# Altium PCB VoltageInput.PcbDoc
Units mm, origin at the board's own origin, x right, y up, seen from the top; angles counter-clockwise.
Board outline 60 x 60 mm, 2 copper layers (Top Layer, Bottom Layer); 40 components, 25 nets, 128 pads, 32 vias.
Unrouted connection lines stored in the file: 80.
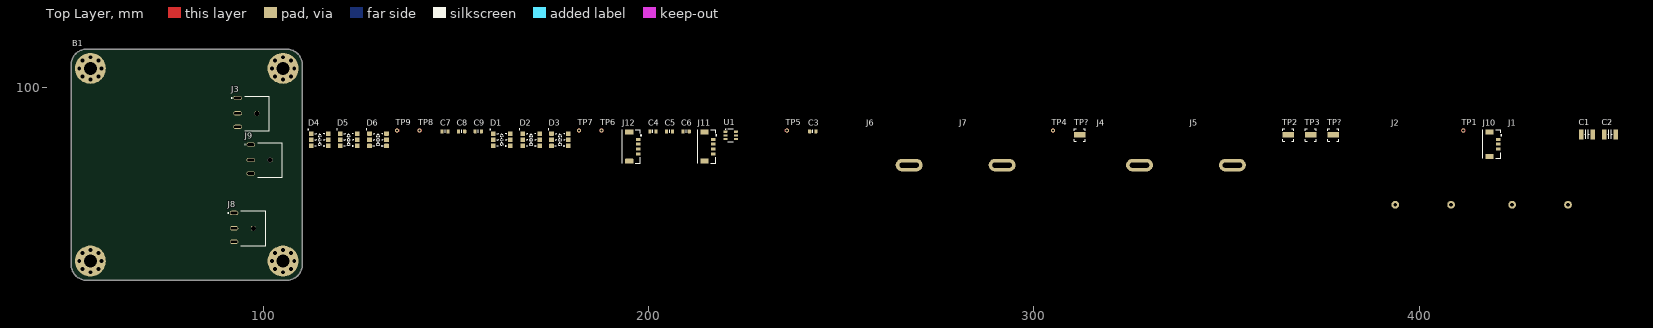
[diagram p0: Top Layer view]
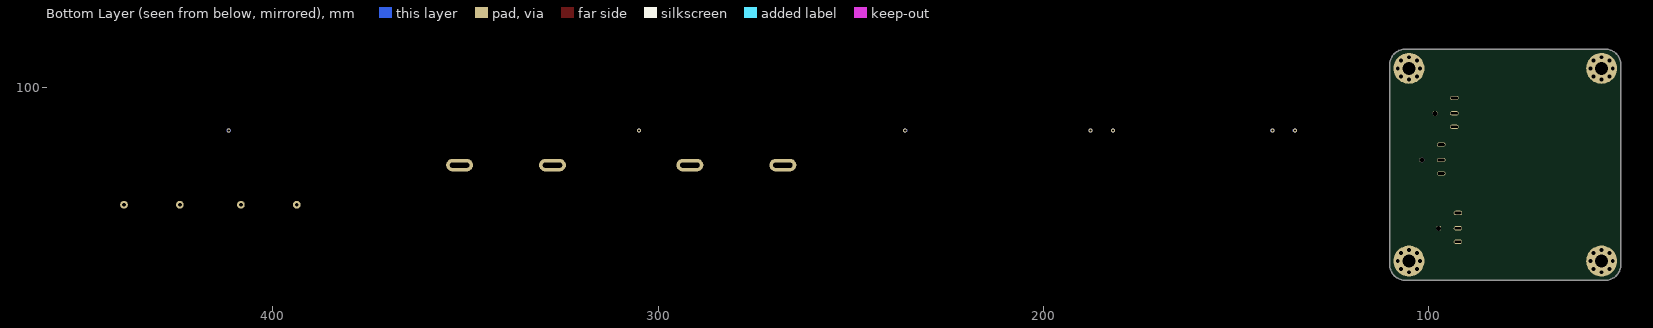
[diagram p1: Bottom Layer view, seen from below]

## Layer stack, top to bottom
Top Solder: solder mask 0.0102, Solder Resist, Dk 3.5
Top Layer: signal copper 0.0356
Dielectric 1: dielectric 0.32, FR-4, Dk 4.8
Bottom Layer: signal copper 0.0356
Bottom Solder: solder mask 0.0102, Solder Resist, Dk 3.5

## Board outline
54,50 cw(c54,54) 50,54 50,106 cw(c54,106) 54,110 106,110 cw(c106,106) 110,106 110,54 cw(c106,54) 106,50

## Design rules (kind name [scope] priority, off if disabled: settings)
Clearance [All] p1: gap=0.254 ignorepadtopadclearanceinfootprint=FALSE except(0: Arc-Hole Track-Hole SMDPad-Hole THPad-Hole Via-Hole Fill-Hole Poly-Hole Region-Hole Text-Hole)
PolygonConnect [All] p1: connectstyle=Relief reliefconductorwidth=0.254 reliefentries=4 polygonreliefangle="90 Angle" airgapwidth=0.254
RoutingVias [All] p1: holewidth=0.711 width=1.27 viastyle="Through Hole" minholewidth=0.711 minwidth=1.27 maxholewidth=0.711 maxwidth=1.27
SolderMaskExpansion [All] p1: expansion=0.102 istentingtop=FALSE
Width [All] p1: maxlimit=0.254 minlimit=0.254 preferedwidth=0.254
30 further rules are at their usual default settings.

## Components (designator, comment, footprint, x,y, rotation, side; value= is the part's Value field where it differs from the comment)
B1 "Board Outline Square" PCB_OUTLINE_SQUARE 80,80 r0 top locked
C1 "Capacitor - Ceramic - Generic" CAPACITOR_1210(3225)_GENERIC 443.611,87.884 r0 top value=10uF
C2 "Capacitor - Ceramic - Generic" CAPACITOR_1210(3225)_GENERIC 449.58,87.884 r0 top value=10uF
C3 "Capacitor - Ceramic - Generic" CAPACITOR_0603(1608)_GENERIC 242.57,88.646 r0 top value=100nF
C4 "Capacitor - Ceramic - Generic" CAPACITOR_0603(1608)_GENERIC 201.041,88.646 r0 top value=100nF
C5 "Capacitor - Ceramic - Generic" CAPACITOR_0603(1608)_GENERIC 205.359,88.646 r0 top value=100nF
C6 "Capacitor - Ceramic - Generic" CAPACITOR_0603(1608)_GENERIC 209.677,88.646 r0 top value=100nF
C7 "Capacitor - Ceramic - Generic" CAPACITOR_0603(1608)_GENERIC 147.066,88.646 r0 top value=100nF
C8 "Capacitor - Ceramic - Generic" CAPACITOR_0603(1608)_GENERIC 151.384,88.646 r0 top value=100nF
C9 "Capacitor - Ceramic - Generic" CAPACITOR_0603(1608)_GENERIC 155.702,88.646 r0 top value=100nF
D1 "APA102C" 5X5MM(6PIN)_JLEAD_GENERIC 161.798,86.487 r0 top
D2 "APA102C" 5X5MM(6PIN)_JLEAD_GENERIC 169.418,86.487 r0 top
D3 "APA102C" 5X5MM(6PIN)_JLEAD_GENERIC 176.911,86.487 r0 top
D4 "APA102C" 5X5MM(6PIN)_JLEAD_GENERIC 114.554,86.487 r0 top
D5 "APA102C" 5X5MM(6PIN)_JLEAD_GENERIC 122.047,86.487 r0 top
D6 "APA102C" 5X5MM(6PIN)_JLEAD_GENERIC 129.667,86.487 r0 top
J1 "PP45 Staple" CONNECTOR_ACCESSORY_PP45-STAPLE_ANDERSON 431.419,69.596 r0 top
J2 "PP45 Staple" CONNECTOR_ACCESSORY_PP45-STAPLE_ANDERSON 401.066,69.596 r0 top
J3 "839-1508-ND" CONNECTOR_BARREL_TENSILITY_839-1508-ND 98.218,93.345 r90 top
J4 "PP45" CONNECTOR_BTOC_PP45_ANDERSON 327.406,79.883 r0 top
J5 "PP45" CONNECTOR_BTOC_PP45_ANDERSON 351.536,79.883 r0 top
J6 "PP45" CONNECTOR_BTOC_PP45_ANDERSON 267.589,79.883 r0 top
J7 "PP45" CONNECTOR_BTOC_PP45_ANDERSON 291.719,79.883 r0 top
J8 "839-1508-ND" CONNECTOR_BARREL_TENSILITY_839-1508-ND 97.282,63.5 r90 top
J9 "839-1508-ND" CONNECTOR_BARREL_TENSILITY_839-1508-ND 101.647,81.224 r90 top
J10 "Connector - Header - 3P 2M - Generic" CONNECTOR_HEADER_MOLEX_5055670381 418.846,85.344 r90 top
J11 "Connector - Header - 4P 2M - Generic" CONNECTOR_HEADER_MOLEX_5055670481 215.011,84.709 r90 top
J12 "Connector - Header - 4P 2M - Generic" CONNECTOR_HEADER_MOLEX_5055670481 195.453,84.709 r90 top
TP1 "Test Point - THT" TESTPOINT_THT_OCTAGON 411.48,88.9 r90 top
TP2 "519XTR" TESTPOINT_LOOP_SMD_KEYSTONE_519X 366.014,87.757 r0 top
TP3 "519XTR" TESTPOINT_LOOP_SMD_KEYSTONE_519X 371.856,87.757 r0 top
TP4 "Test Point - THT" TESTPOINT_THT_OCTAGON 304.927,88.9 r90 top
TP5 "Test Point - THT" TESTPOINT_THT_OCTAGON 235.839,88.9 r90 top
TP6 "Test Point - THT" TESTPOINT_THT_OCTAGON 187.706,88.9 r90 top
TP7 "Test Point - THT" TESTPOINT_THT_OCTAGON 181.864,88.9 r90 top
TP8 "Test Point - THT" TESTPOINT_THT_OCTAGON 140.462,88.9 r90 top
TP9 "Test Point - THT" TESTPOINT_THT_OCTAGON 134.62,88.9 r90 top
TP? "519XTR" TESTPOINT_LOOP_SMD_KEYSTONE_519X 377.698,87.757 r0 top
TP? "519XTR" TESTPOINT_LOOP_SMD_KEYSTONE_519X 311.912,87.757 r0 top
U1 "LM74700" SOT23-6(DBV0006A)_TI 221.234,87.63 r0 top

## Footprints (in the part's own frame and the unit in brackets; to place one, negate y for a bottom-side part, rotate by r counter-clockwise, add the part's x,y. Pads: shape width x height; smd on the part's side, far side on the other; paste and mask are expansions set on the pad)
5X5MM(6PIN)_JLEAD_GENERIC [mm]
  rrect20% 1.2x1.2 smd: 1(-2.2,1.6) 2(-2.2,0) 3(-2.2,-1.6) 4(2.2,-1.6) 5(2.2,0) 6(2.2,1.6)
  silkscreen extent -3.1,-1.8 1.3,2.8, body extent -2.75,-2.5 2.75,2.5, height 1.55
CAPACITOR_0603(1608)_GENERIC [mm]
  rrect20% 0.8x0.95 smd: 1(-0.8,0) 2(0.8,0)
  silkscreen extent 0,-0.4 0,0.4, body extent -0.8,-0.4 0.8,0.4, height 0.9
CAPACITOR_1210(3225)_GENERIC [mm]
  rrect20% 1.15x2.6 smd: 1(-1.5,0) 2(1.5,0)
  silkscreen extent -0.6,-1.2 0.6,1.2, body extent -1.6,-1.25 1.6,1.25, height 2
CONNECTOR_ACCESSORY_PP45-STAPLE_ANDERSON [mm]
  round 2 hole 1: 1(-7.25,0) 1(7.25,0)
  oval 7x3.25 on Mech16: ""(-4,18.2) ""(3.9,18.2)
  body extent -7.75,-0.5 7.75,0.5, height 9.4
CONNECTOR_BARREL_TENSILITY_839-1508-ND [mm]
  oval 1.108x2.216 hole 0.6 slot 1.8 at 90 deg mask+0.05: 1(4,5) 2(-3.5,5) 3(0,5)
  round 1.3 hole 1.3 unplated paste-2539.97 mask+0: ""(0,0)
  silkscreen extent -4.5,-3.2 4.5,6.6, body extent -4.25,-3 4.25,6.5, height 5.5
CONNECTOR_BTOC_PP45_ANDERSON [mm]
  oval 7x3.25 hole 1.25 slot 5 at 0 deg: 1(0,0)
  oval 7x3.25 on Mech16: ""(-7.9,0) ""(0,7.92) ""(7.9,0)
  body extent -4.45,-28.1 3.96,0.52, height 8.39
CONNECTOR_HEADER_MOLEX_5055670381 [mm]
  rrect20% 0.8x1.2 smd: 1(1.25,-1.75) 2(0,-1.75) 3(-1.25,-1.75)
  rrect20% 1.3x2.15 smd mask+0.076: M1(3.15,0.545) M2(-3.15,0.545)
  silkscreen extent -3.7,-2.65 3.7,2.3
CONNECTOR_HEADER_MOLEX_5055670481 [mm]
  rrect20% 0.8x1.2 smd: 1(1.875,-1.75) 2(0.625,-1.75) 3(-0.625,-1.75) 4(-1.875,-1.75)
  rrect20% 1.3x2.15 smd mask+0.076: M1(3.775,0.545) M2(-3.775,0.545)
  silkscreen extent -4.33,-2.65 4.33,2.3
PCB_OUTLINE_SQUARE [mm]
  round 8 hole 3.4: 1(-25,-25) 1(-25,25) 1(25,-25) 1(25,25)
SOT23-6(DBV0006A)_TI [mm]
  rrect20% 0.972x0.558 smd: 1(-1.362,0.95) 2(-1.362,0) 3(-1.362,-0.95) 4(1.362,-0.95) 5(1.362,0) 6(1.362,0.95)
  silkscreen extent -1.35,-1.7 0.7,1.7, body extent -1.5,-1.52 1.5,1.52, height 1.45
TESTPOINT_LOOP_SMD_KEYSTONE_519X [mm]
  rrect10% 3x1.5 smd: 1(0,0)
  silkscreen extent -1.4,-1.6 1.4,1.6, body extent -1.25,-1.5 1.25,1.5, height 2.49
TESTPOINT_THT_OCTAGON [mm]
  oct 1x1 hole 0.6: 1(0,0)
  Top Layer region: -0.2,-0.5 -0.5,-0.2 -0.5,0.2 -0.2,0.5 0.2,0.5 0.5,0.2 0.5,-0.2 0.2,-0.5
  Bottom Layer region: -0.2,-0.5 -0.5,-0.2 -0.5,0.2 -0.2,0.5 0.2,0.5 0.5,0.2 0.5,-0.2 0.2,-0.5

## Part data
B1: library part Board_Outline_Square
C1 C2: library part CAP-CER_10UF_100V_20%_X7S_1210(3225), "10uF ±20% 100V Ceramic Capacitor X7S 1210(3225 Metric)", Manufacturer 1="Murata Electronics", Manufacturer Lifecycle 1=Active, Manufacturer Part Number 1=GRM32EC72A106ME05L, Manufacturer Part Number 2=GRM32EC72A106KE05L, Manufacturer Part Number 3=GRM32EC72A106KE05K, Package/Case Imperial=1210, Package/Case Metric=3225, Temperature Coefficient=X7S, Tolerance=20%, Voltage - Rated=100V, Full Item="Ceramic Capacitor", Item=CAP-CER, Manufacturer 2="Murata Electronics", Manufacturer 3="Murata Electronics", Manufacturer Lifecycle 2=Active, Manufacturer Lifecycle 3=Active, Mounting Type=SMT, Name=CAP-CER_10UF_100V_20%_X7S_1210(3225)
C3 C4 C5 C6 C7 C8 C9: library part CAP-CER_100NF_100V_20%_X7R_0603(1608), "100nF ±20% 100V Ceramic Capacitor X7R 0603(1608 Metric)", Manufacturer 1="Murata Electronics", Manufacturer Lifecycle 1=Active, Manufacturer Part Number 1=GRM188R72A104KA35D, Manufacturer Part Number 2=GRM188R72A104KA35J, Manufacturer Part Number 3=GRM188R72A104MA35D, Package/Case Imperial=0603, Package/Case Metric=1608, Temperature Coefficient=X7R, Tolerance=20%, Voltage - Rated=100V, Full Item="Ceramic Capacitor", Item=CAP-CER, Manufacturer 2="Murata Electronics", Manufacturer 3="Murata Electronics", Manufacturer Lifecycle 2=Active, Manufacturer Lifecycle 3=Active, Mounting Type=SMT, Name=CAP-CER_100NF_100V_20%_X7R_0603(1608)
D1 D2 D3 D4 D5 D6: library part "Diode - LED - Addressable - 5x5mm APA102C", Supplier Part Number 1=1568-COM-16345-ND, Supplier 1=Digi-Key, Supplier 2=Mouser, Supplier Part Number 2=474-COM-16345
J1 J2: library part "Connector - Accessory - Mechanical Support - Anderson PP45 Staple"
J3 J8 J9: library part "Connector - Barrel - 3.5mmx1.1mm - Tensility 839-1508-ND", Supplier 1=Digi-Key, Supplier Part Number 1=839-1508-ND
J4 J5 J6 J7: library part "Connector - Modular - 1P - Anderson PP45"
J10: library part CON_HDR_3P_1.25MM-PITCH_50V_2.4A_SMT_MOLEX_5055670381, "Connector Header 3 Pin 1.25mm Pitch Mating 50V 2.4A Rated 5 Walls Shrouded SMT Molex 5055670381", Current - Max=2.4A, Manufacturer 1=Molex, Manufacturer Lifecycle 1=Active, Manufacturer Part Number 1=5055670381, Voltage - Max=50V, Fastening Type="Locking Ramp", Full Item="Connector Header", Item=CON_HDR, Mounting Type=SMT, Name=CON_HDR_3P_1.25MM-PITCH_50V_2.4A_SMT_MOLEX_5055670381, Number of Positions=3, Pitch - Mating=1.25mm, Shrouding="5 Walls"
J11 J12: library part CON_HDR_4P_1.25MM-PITCH_50V_2.4A_SMT_MOLEX_5055670481, "Connector Header 4 Pin 1.25mm Pitch Mating 50V 2.4A Rated 6 Walls Shrouded SMT Molex 5055670481", Current - Max=2.4A, Manufacturer 1=Molex, Manufacturer Lifecycle 1=Active, Manufacturer Part Number 1=5055670481, Voltage - Max=50V, Fastening Type="Locking Ramp", Full Item="Connector Header", Item=CON_HDR, Mounting Type=SMT, Name=CON_HDR_4P_1.25MM-PITCH_50V_2.4A_SMT_MOLEX_5055670481, Number of Positions=4, Pitch - Mating=1.25mm, Shrouding="6 Walls"
TP2 TP3 TP? TP?: library part "Test Point - SMT - Loop - Keystone 519X"
U1: library part "IC - Power Management - Ideal Diode Controller - TI LM74700", Supplier Part Number 1=595-LM74700QDBVTQ1, Supplier 1=Mouser, Supplier 2="Texas Instruments", Supplier 3=Digi-Key, Supplier 4=Digi-Key, Supplier Part Number 2=LM74700QDBVTQ1, Supplier Part Number 3=296-53420-1-ND, Supplier Part Number 4=296-53420-6-ND

## Via types
v1: diameter 1.4, hole 1, Top Layer to Bottom Layer, 32 vias

## Nets (pads, with @x,y where several pads share a name; then routed paths per layer and width w, separated by ;. In a path a pad name is that pad's centre, name@x,y a point inside that pad or via, vN(x,y) a via of type N, cw(c..) or ccw(c..) an arc to the next point about the centre after c; other vN are vias at no path point)
5V: C4.1 C5.1 C6.1 C7.1 C8.1 C9.1 D1.4 D2.4 D3.4 D4.4 D5.4 D6.4 J11.4 J12.1
CKI: D1.2 J11.3 TP6.1
CKIO: D3.5 D4.2
CKO: D6.5 J12.2 TP8.1
GND: C1.2 C2.2 C3.1 C4.2 C5.2 C6.2 C7.2 C8.2 C9.2 D1.3 D2.3 D3.3 D4.3 D5.3 D6.3 J1.1 J2.1 J6.1 J7.1 J8.2 J9.2 J10.2 J10.M1 J10.M2 J11.1 J11.M1 J11.M2 J12.4 J12.M1 J12.M2 U1.2
MISC1: J10.1 TP?.1@377.698,87.757 U1.3
MISC2: J9.3 J10.3 TP5.1 TP?.1@311.912,87.757
NetC3_2: C3.2 U1.1
NetD1_5: D1.5 D2.2
NetD1_6: D1.6 D2.1
NetD2_5: D2.5 D3.2
NetD2_6: D2.6 D3.1
NetD4_5: D4.5 D5.2
NetD4_6: D4.6 D5.1
NetD5_5: D5.5 D6.2
NetD5_6: D5.6 D6.1
NetJ3_2: J3.2 J8.1
NetJ3_3: J3.3 TP1.1
NetJ8_3: J8.3 TP4.1
NetQ1_2: U1.5
SDI: D1.1 J11.2 TP7.1
SDIO: D3.6 D4.1
SDO: D6.6 J12.3 TP9.1
VIN: C1.1 J3.1 J4.1 J9.1 TP2.1 U1.6
VOUT: C2.1 J5.1 TP3.1 U1.4
pads on no net: B1.1 J1. J2. J3. J4. J5. J6. J7. J8. J9.
copper on no net:
  other v1: 55,52.1 105,52.1 52.949,52.949 57.051,52.949 102.949,52.949 107.051,52.949 52.1,55 57.9,55 102.1,55 107.9,55 52.949,57.051 57.051,57.051 102.949,57.051 107.051,57.051 55,57.9 105,57.9 55,102.1 105,102.1 52.949,102.949 57.051,102.949 102.949,102.949 107.051,102.949 52.1,105 57.9,105 102.1,105 107.9,105 52.949,107.051 57.051,107.051 102.949,107.051 107.051,107.051 55,107.9 105,107.9